# EAGLE board Karat (EAGLE 5.07)
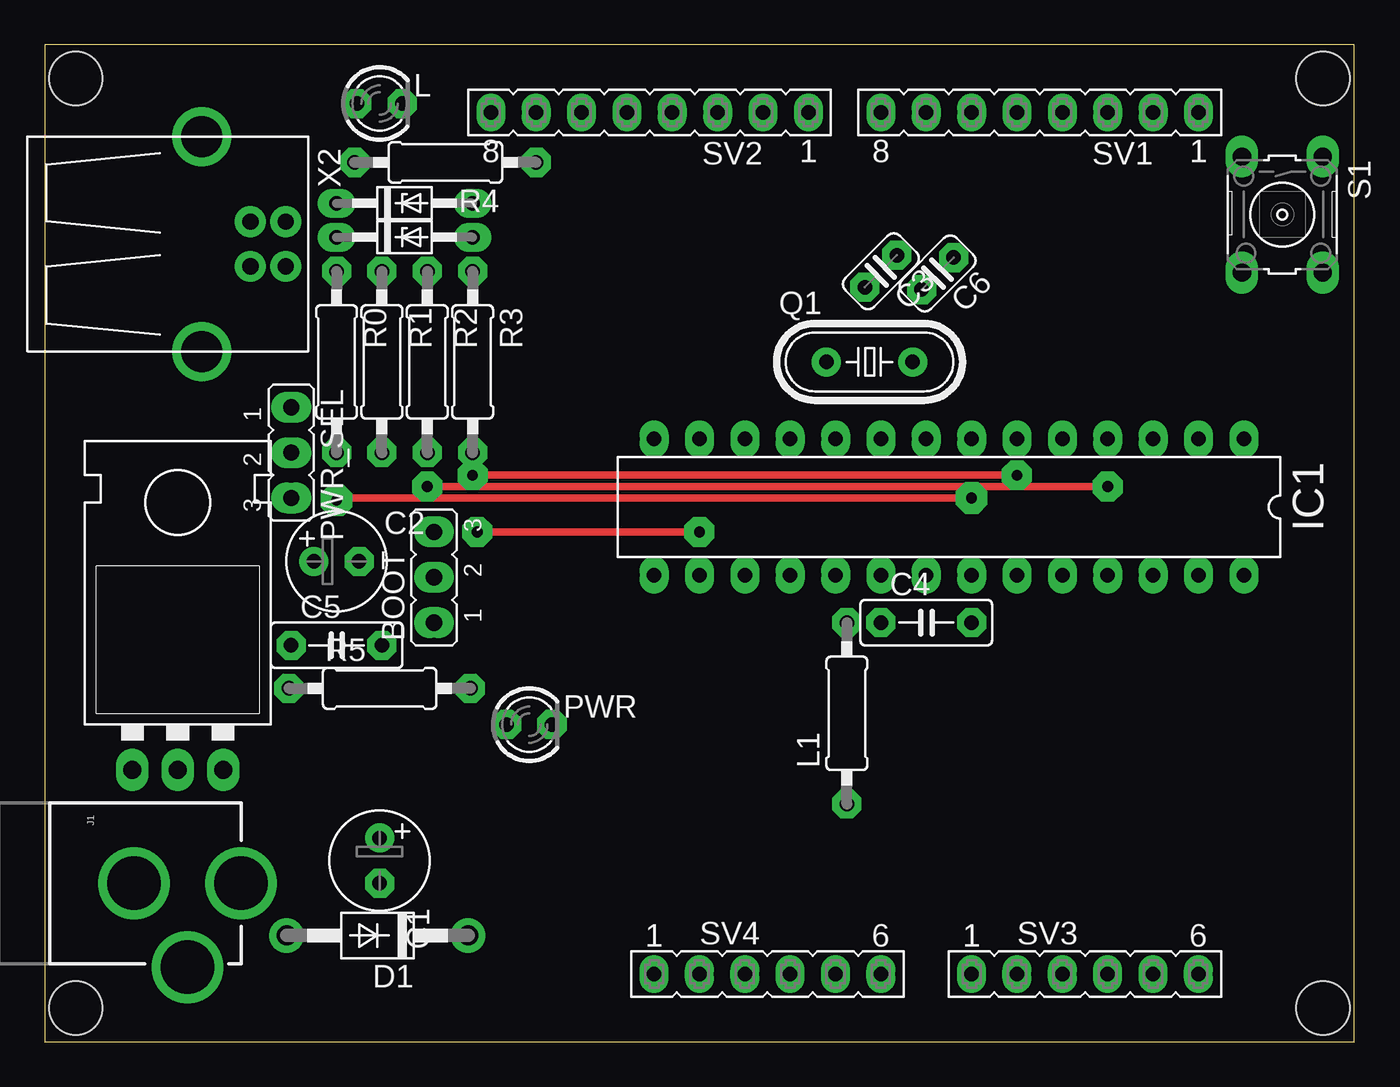
[diagram p0: board, top side]
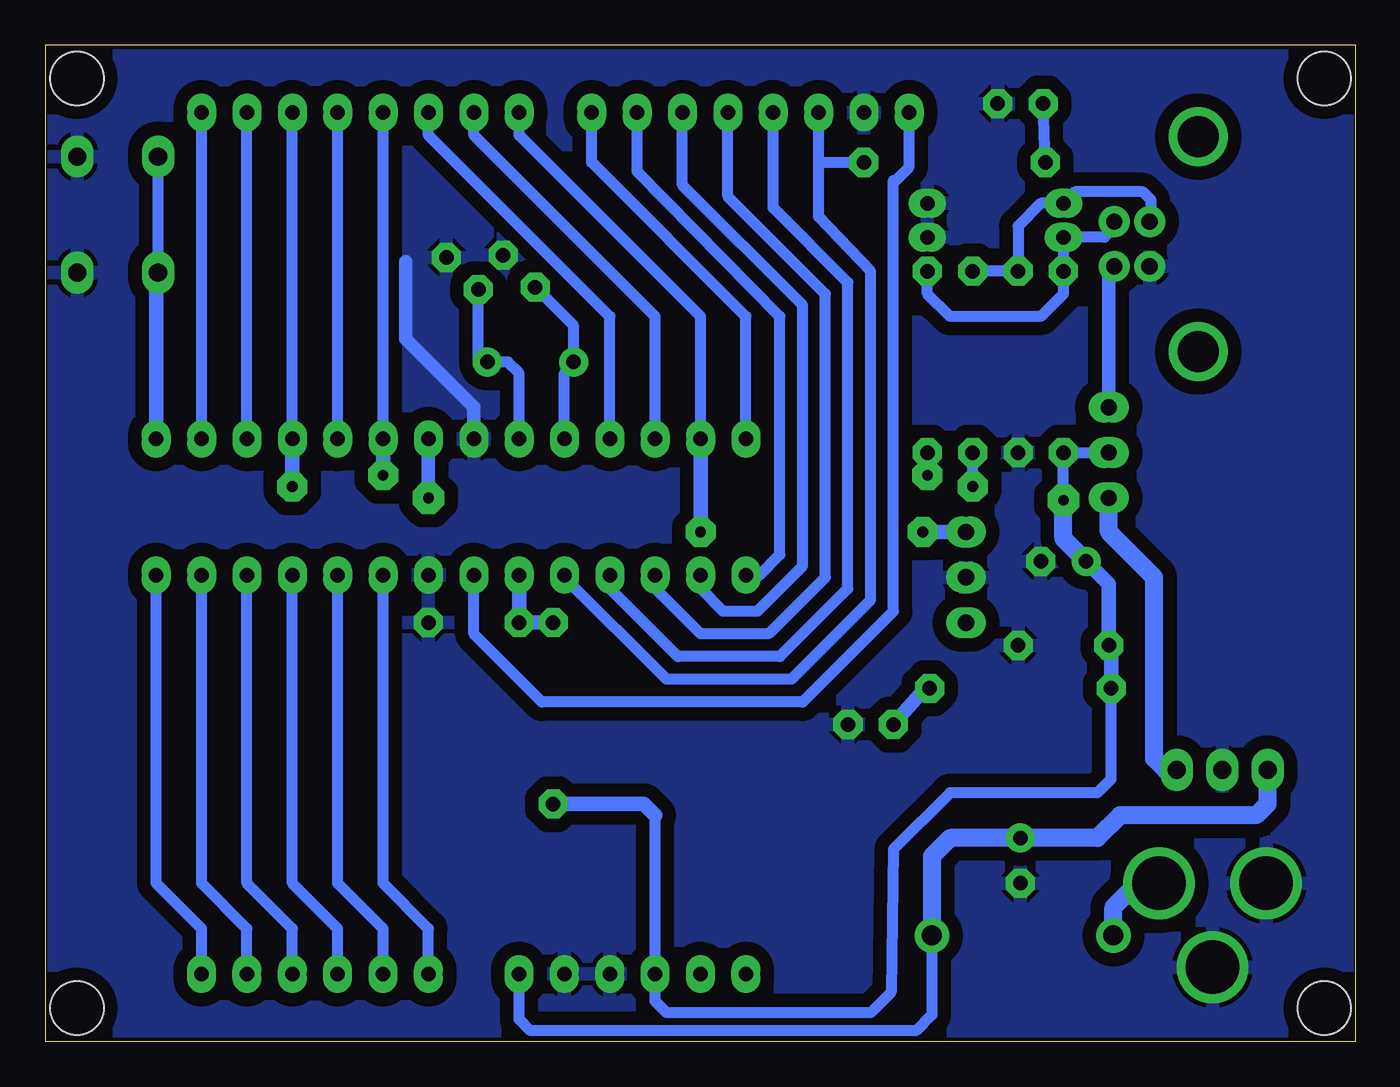
[diagram p1: board, bottom side, seen from below]

Size 73.33 x 55.87 mm. Coordinates in mm from the lower left corner, seen from the top.
Outline: 0,0 73.33,0 73.33,55.87 0,55.87 0,0
Copper layers (1*16): Top 0.035mm / dielectric 1.5mm / Bottom 0.035mm
Design rules "mine *": minimum track width 40mil, minimum drill 31mil, track to track 8mil, track to pad 8mil, pad to pad 8mil, via to via 8mil, smd to smd 8mil, copper to edge 0mil, drill to drill 20mil, minimum pad ring 16mil, minimum via ring 15mil, stop-mask expansion 4mil, vias tented up to drill 0mil, thermal gap 10mil
Holes 3 mm at 71.59,1.9 1.74,1.9 71.59,53.97 1.74,53.97

## Footprints (pad centres in the part's own frame; a part is rotated, then mirrored left to right if it is on the bottom)
JP2 = drill 0.914 long: 1 -2.54,0; 2 0,0; 3 2.54,0
E2,5-6 = drill 0.813 pad 1.6 round: + -1.27,0 | drill 0.813 pad 1.6 octagon: - 1.27,0
C025-024X044 = drill 0.813 octagon: 1 -1.27,0; 2 1.27,0
C5B2.5 = drill 0.813 pad 1.6 octagon: 1 -2.54,0; 2 2.54,0
DO41-10 = drill 1.118 round: A 5.08,0; C -5.08,0
DO34Z7 = drill 0.813 long: A 3.81,0; C -3.81,0
DIL28-3 = drill 0.813 long: 1 -16.51,-3.81; 2 -13.97,-3.81; 3 -11.43,-3.81; 4 -8.89,-3.81; 5 -6.35,-3.81; 6 -3.81,-3.81; 7 -1.27,-3.81; 8 1.27,-3.81; 9 3.81,-3.81; 10 6.35,-3.81; 11 8.89,-3.81; 12 11.43,-3.81; 13 13.97,-3.81; 14 16.51,-3.81; 15 16.51,3.81; 16 13.97,3.81; 17 11.43,3.81; 18 8.89,3.81; 19 6.35,3.81; 20 3.81,3.81; 21 1.27,3.81; 22 -1.27,3.81; 23 -3.81,3.81; 24 -6.35,3.81; 25 -8.89,3.81; 26 -11.43,3.81; 27 -13.97,3.81; 28 -16.51,3.81
78XXL = drill 1.016 long: GND 0,-3.81; IN -2.54,-3.81; OUT 2.54,-3.81
POWER_JACK_PTH = drill 2.997 round: GND 0,7.7; GNDBREAK 4.7,10.7; PWR 0,13.7
LED3MM = drill 0.813 octagon: A -1.27,0; K 1.27,0
0207/10 = drill 0.813 octagon: 1 -5.08,0; 2 5.08,0
HC49/S = drill 0.813 round: 1 -2.413,0; 2 2.413,0
B3F-10XX = drill 1.016 long: 1 -3.251,2.261; 2 3.251,2.261; 3 -3.251,-2.261; 4 3.251,-2.261
FE08 = drill 0.813 long: 1 -8.89,0; 2 -6.35,0; 3 -3.81,0; 4 -1.27,0; 5 1.27,0; 6 3.81,0; 7 6.35,0; 8 8.89,0
FE06 = drill 0.813 long: 1 -6.35,0; 2 -3.81,0; 3 -1.27,0; 4 1.27,0; 5 3.81,0; 6 6.35,0
USB-B-H = drill 0.914 round: D+ 0,1.25; D- 1.981,1.25; GND 0,-1.25; VBUS 1.981,-1.25 | drill 2.286 round: P$1 -2.718,-6.02; P$2 -2.718,6.02

## Placement (x,y rotation side)
BOOT  BOOT  [JP2]  21.81,26.03 90 top
C1  100uF  [E2,5-6]  18.76,10.16 270 top
C2  10uF  [E2,5-6]  16.34,26.92 0 top
C3  22p  [C025-024X044]  46.82,43.17 225 top
C4  [C5B2.5]  49.36,23.49 0 top
C5  [C5B2.5]  16.34,22.22 0 top
C6  22p  [C025-024X044]  50,43.05 225 top
D1  1N4004  [DO41-10]  18.63,5.96 180 top
D2  3V6  [DO34Z7]  20.16,46.98 0 top
D3  3V6  [DO34Z7]  20.16,45.08 0 top
IC1  ATMEGA168-20P  [DIL28-3]  50.63,29.97 180 top
IC2  7805  [78XXL]  7.46,19.05 0 top
J1  POWER_JACKPTH  [POWER_JACK_PTH]  -2.71,8.88 270 top
L  [LED3MM]  18.76,52.57 0 top
L1  100uH  [0207/10]  44.92,18.41 90 top
PWR  [LED3MM]  27.14,17.78 0 top
PWR_SEL  [JP2]  13.8,33.02 270 top
Q1  16MHz  [HC49/S]  46.19,38.09 0 top
R0  1k5  [0207/10]  16.34,38.09 270 top
R1  1M  [0207/10]  18.89,38.09 270 top
R2  68  [0207/10]  21.43,38.09 270 top
R3  68  [0207/10]  23.96,38.09 270 top
R4  330  [0207/10]  22.44,49.27 180 top
R5  330  [0207/10]  18.76,19.81 0 top
S1  [B3F-10XX]  69.3,46.35 270 top
SV1  [FE08]  55.71,52.06 180 top
SV2  [FE08]  33.87,52.06 180 top
SV3  [FE06]  58.25,3.8 0 top
SV4  [FE06]  40.47,3.8 0 top
U$1  FLAG  [FLAG_PDIP]  44.28,5.71 0 top
X2  USB-B-H  [USB-B-H]  11.52,44.7 0 top

## Library data of the parts
BOOT PWR_SEL = jumper
C1-C3 C6 L1 R0 R1-R5 = rcl
C4 C5 = capacitor-wima
D1-D3 = diode
IC1 = avr
IC2 = v-reg
J1 = SparkFun
L PWR = led
Q1 = crystal
S1 = switch-omron
SV1-SV4 = con-lsta
U$1 = turkish_flag
X2 = con-usb

## Nets
+5USB: PWR_SEL.1 X2.VBUS
+5V: C2.+ C5.1 IC1.7 L1.1 PWR_SEL.2 R0.2 R5.1 SV4.3
+VRAW: C1.+ D1.C IC2.IN SV4.6
D+: D2.C R1.1 R2.1 X2.D+
D-: D3.C R0.1 R3.1 X2.D-
GND: BOOT.2 C1.- C2.- C3.1 C4.2 C5.2 C6.1 D2.A D3.A IC1.8 IC1.22 IC2.GND J1.GND J1.GNDBREAK L.K PWR.K R1.2 S1.1 S1.2 SV2.7 SV4.4 SV4.5 X2.GND
N$1: IC1.6 R3.2 SV1.5
N$3: IC1.4 R2.2 SV1.3
N$4: D1.A J1.PWR
N$5: IC1.18 SV2.5
N$6: IC1.2 SV1.1
N$7: C4.1 IC1.20 L1.2
N$8: IC2.OUT PWR_SEL.3
N$9: C3.2 IC1.10 Q1.1
N$10: C6.2 IC1.9 Q1.2
N$11: IC1.3 SV1.2
N$12: IC1.5 SV1.4
N$13: IC1.11 SV1.6
N$14: IC1.12 SV1.7
N$15: BOOT.3 IC1.13 SV1.8
N$16: IC1.23 SV3.1
N$17: IC1.24 SV3.2
N$18: IC1.25 SV3.3
N$19: IC1.26 SV3.4
N$20: IC1.27 SV3.5
N$21: IC1.28 SV3.6
N$22: IC1.14 SV2.1
N$23: IC1.15 SV2.2
N$24: IC1.16 SV2.3
N$25: IC1.17 SV2.4
N$26: L.A R4.2
N$27: IC1.19 R4.1 SV2.6
N$28: IC1.21 SV2.8
N$29: PWR.A R5.2
RESET: IC1.1 S1.3 S1.4

## Tracks (layer width: path | path; a pad name or v marks a point on that pad's centre or on a via)
+5USB
  Bottom 0.61: X2.VBUS 13.5,43.13 13.8,42.83
  Bottom 0.762: PWR_SEL.1 13.8,42.83
+5V  (via drill 0.6 pad 1.78)
  Top 0.406: v51.9,30.48 16.73,30.48 v16.34,30.35
  Bottom 0.61: PWR_SEL.2 R0.2 v16.34,30.35 | R5.1 13.68,14.73 14.44,13.96 22.7,13.96 25.87,10.79 26,2.79 27.14,1.65 38.57,1.65 39.2,2.28 SV4.3 39.2,12.7
  Bottom 0.762: v51.9,30.48 IC1.7
  Bottom 0.813: L1.1 39.84,13.33 39.2,12.7 | R5.1 13.68,22.35 C5.1 13.8,25.65 C2.+
  Bottom 1.016: C2.+ 16.34,28.19 v16.34,30.35
+VRAW
  Bottom 0.61: D1.C 23.71,1.52 24.6,0.63 46.19,0.63 46.82,1.26 SV4.6
  Bottom 1.016: D1.C 23.71,10.41 22.7,11.43 C1.+ 14.44,11.43 13.17,12.7 5.55,12.7 4.92,13.33 IC2.IN
D+
  Bottom 0.61: R2.1 R1.1 18.89,45.72 17.62,46.98 D2.C 15.71,47.62 11.9,47.62 11.44,47.16 11.44,46.03 X2.D+
D-
  Bottom 0.61: R3.1 23.96,41.91 22.7,40.63 17.62,40.63 16.34,41.91 R0.1 D3.C 14.05,45.08 13.5,45.63 X2.D-
GND
  Bottom 0.762: IC1.8 49.36,35.55 53.17,39.37 53.17,43.7
  pour Bottom (isolate 0.762): 0.47,55.24 0.47,0.63 72.86,0.63 72.86,55.24
N$1  (via drill 0.6 pad 1.68)
  Top 0.406: v23.96,31.75 v54.45,31.75
  Bottom 0.61: R3.2 v23.96,31.75 | IC1.6 SV1.5
  Bottom 0.813: v54.45,31.75 IC1.6 54.45,34.29
N$3  (via drill 0.6 pad 1.68)
  Top 0.406: v21.43,31.11 v59.52,31.11
  Bottom 0.61: v21.43,31.11 R2.2 | IC1.4 SV1.3
  Bottom 0.813: v59.52,31.11 IC1.4 59.52,34.29
N$4
  Bottom 1.016: D1.A 13.55,7.55 12.21,8.88 J1.PWR
N$5
  Bottom 0.61: IC1.18 41.74,25.39 37.93,21.59 32.22,21.59 28.41,25.39 28.41,42.54 32.6,46.73 SV2.5
N$6
  Bottom 0.61: IC1.2 SV1.1
N$7
  Bottom 0.813: L1.2 C4.1 IC1.20
N$8
  Bottom 1.016: PWR_SEL.3 13.8,28.57 11.27,26.03 11.27,15.87 10.63,15.24 IC2.OUT
N$9
  Bottom 0.61: IC1.10 44.28,37.46 Q1.1 43.78,40.13 C3.2
N$10
  Bottom 0.61: IC1.9 46.82,37.46 47.46,38.09 Q1.2 49.1,38.23 C6.2
N$11
  Bottom 0.61: IC1.3 SV1.2
N$12
  Bottom 0.61: IC1.5 SV1.4
N$13
  Bottom 0.61: IC1.11 41.74,40.63 51.9,50.8 SV1.6
N$14
  Bottom 0.61: IC1.12 39.2,40.63 49.36,50.8 SV1.7
N$15  (via drill 0.6 pad 1.68)
  Top 0.406: v24.22,28.57 v36.66,28.57
  Bottom 0.61: 36.66,34.29 36.66,40.63 46.82,50.8 SV1.8
  Bottom 0.762: 36.66,34.29 IC1.13
  Bottom 0.813: v36.66,28.57 36.66,34.29 | BOOT.3 v24.22,28.57
N$16
  Bottom 0.61: IC1.23 54.45,8.88 51.9,6.34 SV3.1
N$17
  Bottom 0.61: IC1.24 56.98,8.88 54.45,6.34 SV3.2
N$18
  Bottom 0.61: IC1.25 59.52,8.88 56.98,6.34 SV3.3
N$19
  Bottom 0.61: IC1.26 62.06,8.88 59.52,6.34 SV3.4
N$20
  Bottom 0.61: IC1.27 64.61,8.88 62.06,6.34 SV3.5
N$21
  Bottom 0.61: IC1.28 67.15,8.88 64.61,6.34 SV3.6
N$22
  Bottom 0.61: IC1.14 34.12,40.63 42.76,49.27 SV2.1
N$23
  Bottom 0.61: IC1.15 33.36,26.16 32.22,27.3 32.22,40.63 40.22,48.76 SV2.2
N$24
  Bottom 0.61: IC1.16 36.66,25.39 35.39,24.12 33.49,24.12 30.95,26.66 30.95,41.27 37.68,48 SV2.3
N$25
  Bottom 0.61: IC1.17 39.2,25.39 36.66,22.86 32.85,22.86 29.68,26.03 29.68,41.91 35.14,47.37 SV2.4
N$26
  Bottom 0.61: R4.2 L.A
N$27
  Bottom 0.61: IC1.19 44.28,26.03 38.57,20.32 31.59,20.32 27.14,24.76 27.14,43.17 30.06,46.22 30.06,49.27 | 30.06,49.27 R4.1 | 30.06,49.27 SV2.6
N$28
  Bottom 0.508: 25.87,48.26 25.74,48.26
  Bottom 0.61: IC1.21 49.36,22.86 45.55,19.05 30.95,19.05 25.87,24.12 25.87,48.26 | 25.74,48.26 24.98,49.02 SV2.8
N$29
  Bottom 0.61: R5.2 23.96,20.06 23.96,19.93
  Bottom 0.762: 23.96,19.93 PWR.A
RESET
  Bottom 0.61: S1.4 S1.3
  Bottom 0.813: IC1.1 67.15,42.95 S1.4

## Text on the board
tDocu: GND | L | Aref | YENILE | 8 | 7 | 6 | 5 | 4 | 3 | 2 | 1 | 0 | 13 | 12 | 11 | 10 | 9 | DIJITAL | TX | RX | PWM | PWM | PWM | PWM | PWM | PWM | yedi | USB | karat | 7805 | YÜKLE | CALISTIR | ACIK | MALI | TÜRK | ANALOG | +5V | GND | 9V | 0 | 1 | 2 | 3 | 4 | 5 | www.projeyedi.com